# Altium PCB PCB1.pcbdoc (part 1 of 2)
Units mil, origin at the board's own origin, x right, y up, seen from the top; angles counter-clockwise.
Board outline 2760.2 x 1953.83 mil, 2 copper layers (Top Layer, Bottom Layer); 18 components, 51 nets, 238 pads, 251 vias.
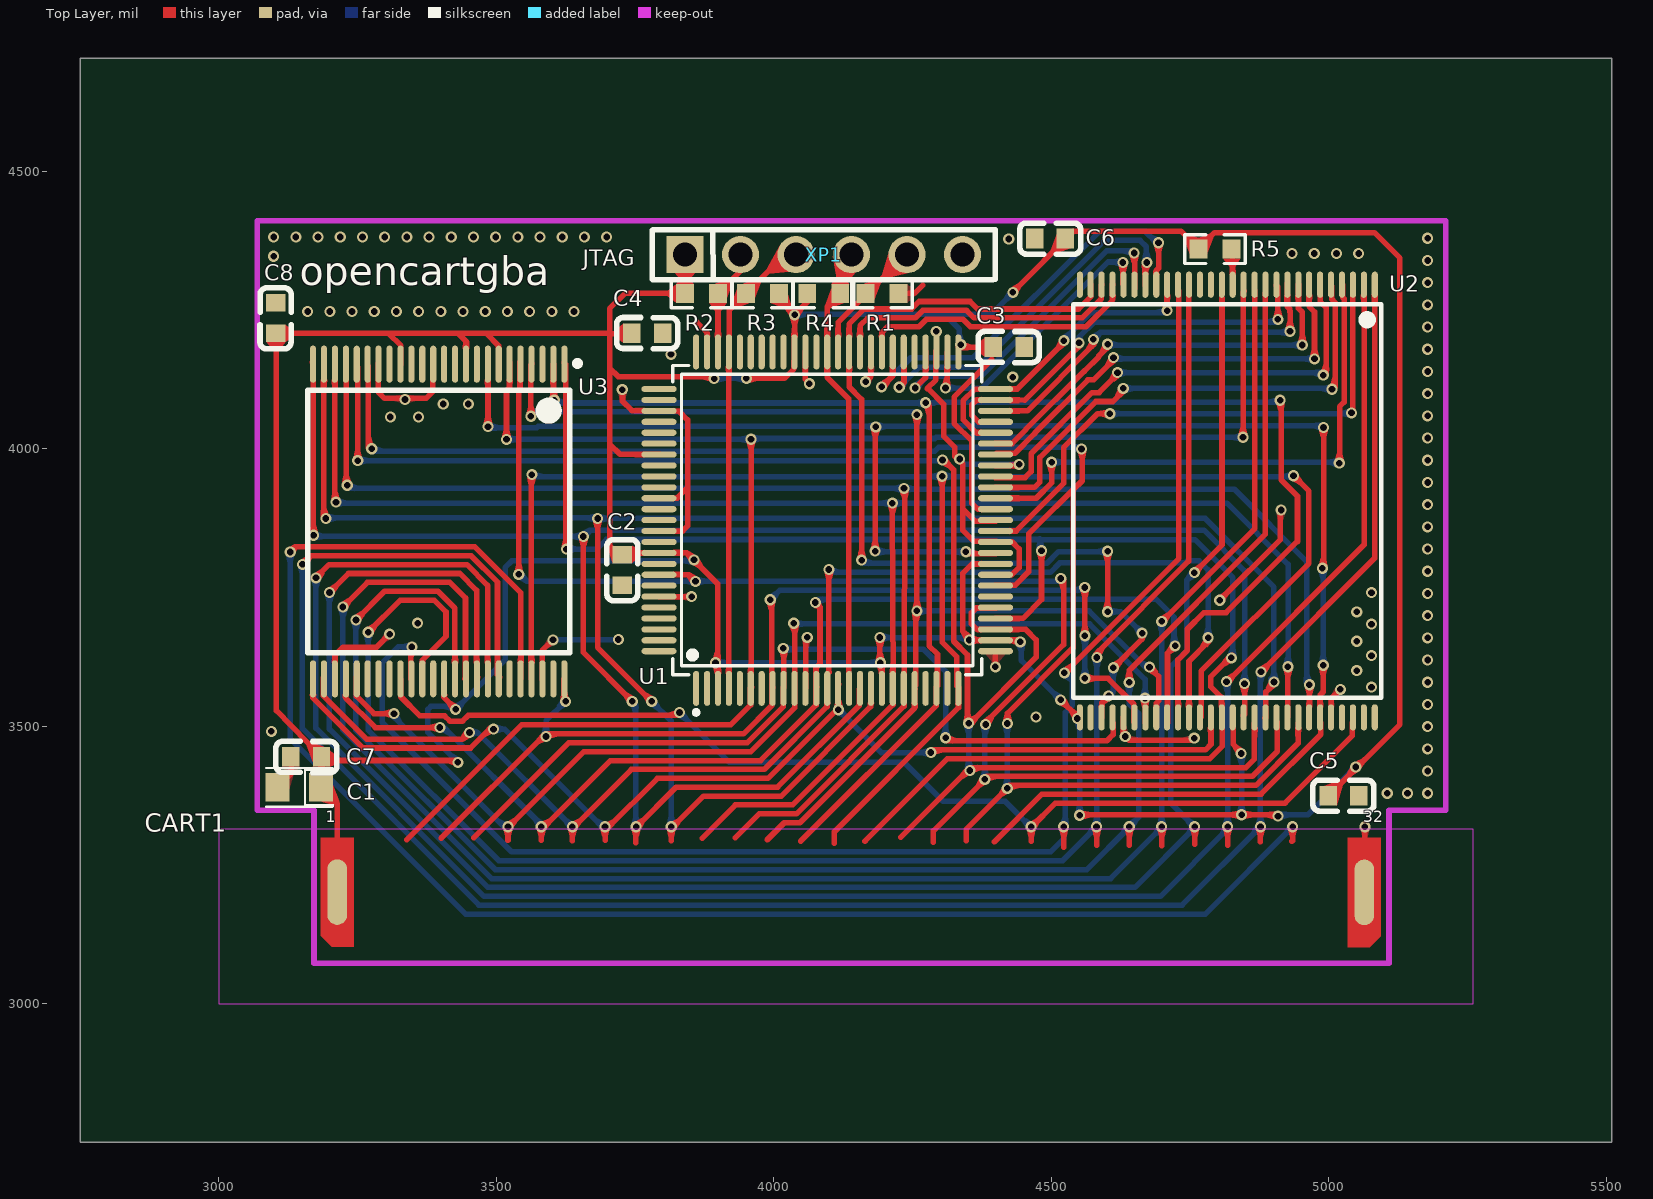
[diagram p0: Top Layer view]
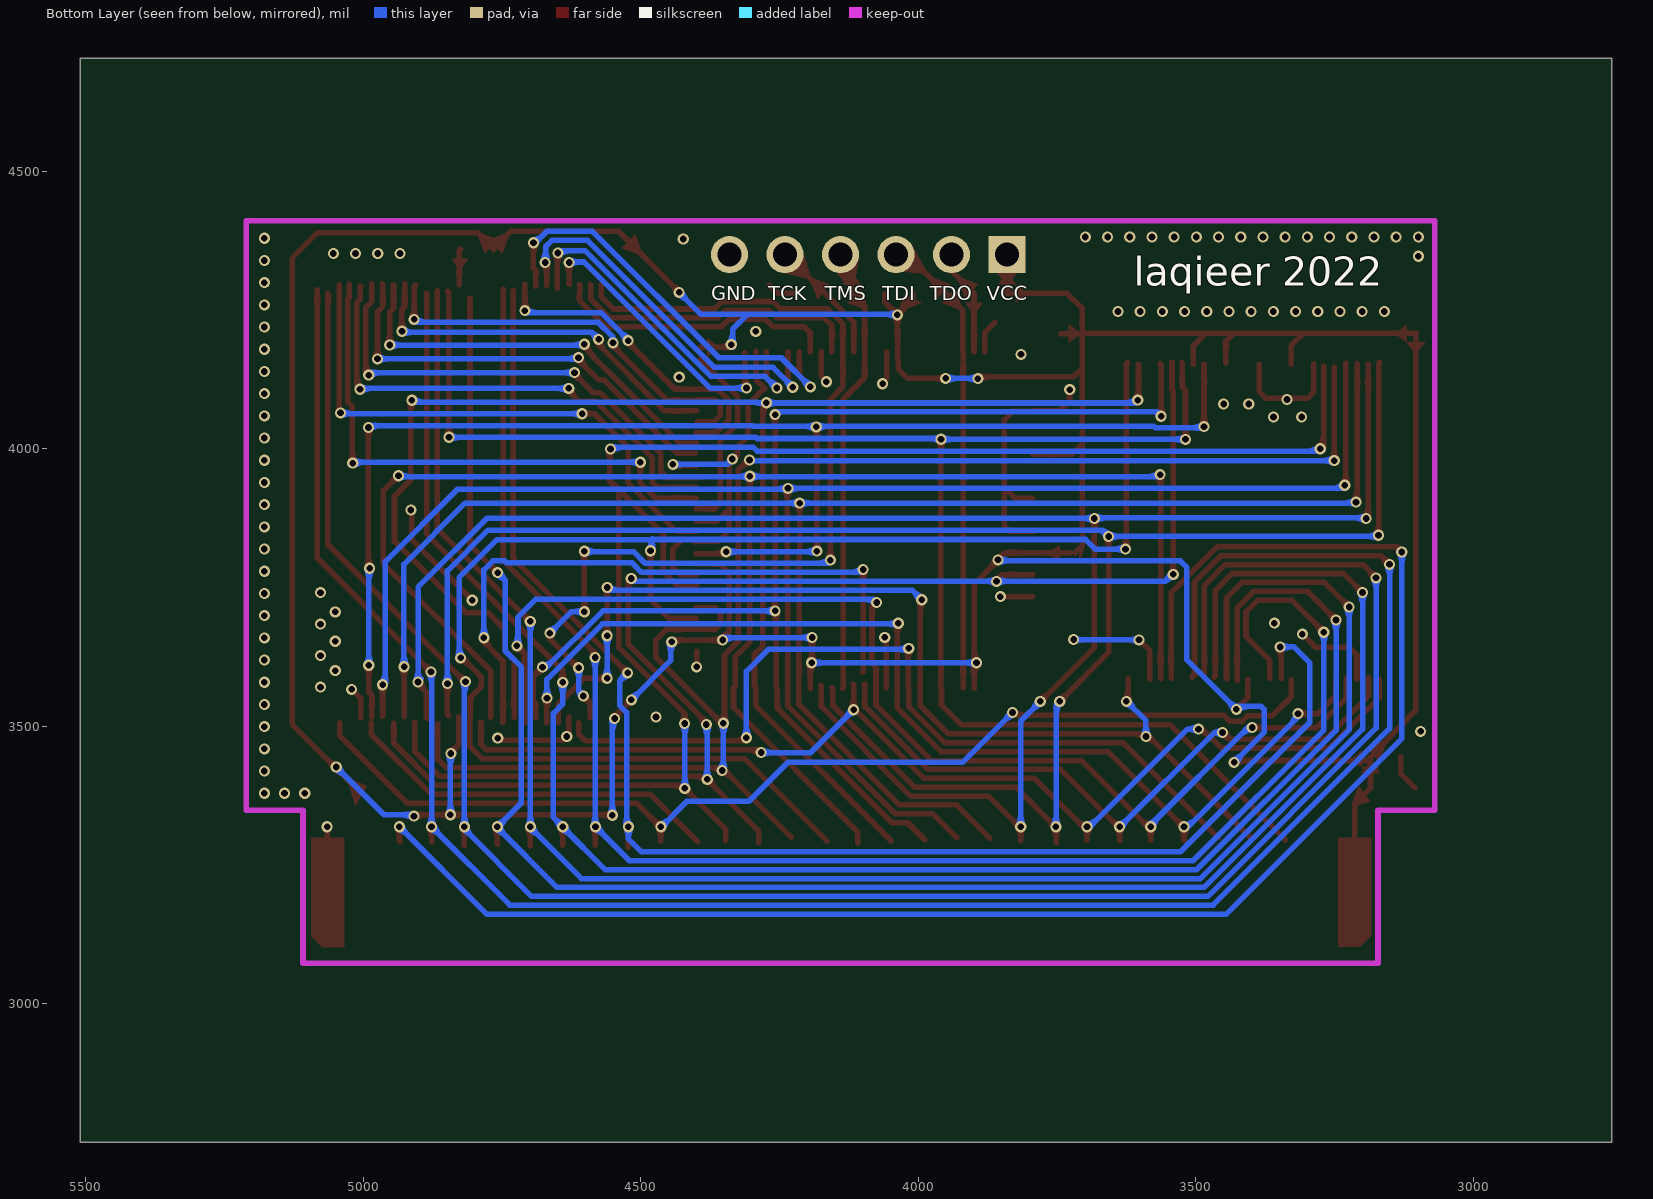
[diagram p1: Bottom Layer view, seen from below]

## Layer stack, top to bottom
Top Layer: signal copper (thickness not stored)
Dielectric: dielectric 12.6, FR-4, Dk 4.8
Bottom Layer: signal copper (thickness not stored)

## Board outline
5510.2,2750 2750,2750 2750,4703.83 5510.2,4703.83

## Design rules (kind name [scope] priority, off if disabled: settings)
Clearance safeClearance [All] p1: gap=7 ignorepadtopadclearanceinfootprint=FALSE except(0: Via-Fill Fill-Poly Region-Poly Poly-Poly; 6: Track-Track Track-SMDPad SMDPad-SMDPad Track-THPad SMDPad-THPad THPad-THPad Track-Via SMDPad-Via THPad-Via Via-Via Track-Fill SMDPad-Fill THPad-Fill Fill-Fill Track-Region SMDPad-Region THPad-Region Via-Region Fill-Region Region-Region Track-Text SMDPad-Text THPad-Text Via-Text Fill-Text Region-Text Poly-Text Text-Text Track-Hole SMDPad-Hole THPad-Hole Via-Hole Fill-Hole Region-Hole Text-Hole; 11.8: Track-Sheet SMDPad-Sheet THPad-Sheet Via-Sheet Fill-Sheet Region-Sheet Poly-Sheet Text-Sheet Sheet-Hole; 12: Track-Poly SMDPad-Poly THPad-Poly Via-Poly Poly-Hole)
DiffPairsRouting differentialPair [All] p1: maxuncoupledlength=10 minlimit=6 maxlimit=50 mostfreqgap=6 toplayer_minwidth=5 toplayer_prefwidth=10 toplayer_maxwidth=100 bottomlayer_minwidth=5 bottomlayer_prefwidth=10 bottomlayer_maxwidth=100
PasteMaskExpansion pasteMaskExpansion [All] p1: expansion=0
PlaneConnect innerPlane [All] p1: planeconnectstyle=Relief reliefexpansion=20 reliefentries=4 reliefconductorwidth=10 reliefairgap=10
PolygonConnect copperRegion [All] p1: connectstyle=Relief reliefentries=4 reliefconductorwidth=10 polygonreliefangle="90 Angle" airgapwidth=10
RoutingVias viaSize [All] p1: viastyle="Through Hole" holewidth=12.0078 minholewidth=11.811 maxholewidth=236.2204 width=24.0158 minwidth=19.685 maxwidth=393.7008
SolderMaskExpansion solderMaskExpansion [All] p1: useseparateexpansions=TRUE expansion=4 expansionbottom=4
Width trackWidth [All] p1: maxlimit=100 minlimit=5 preferedwidth=10

## Components (designator, comment, footprint, x,y, rotation, side; value= is the part's Value field where it differs from the comment)
C1 "10uf" CAP-SMD_L2.0-W1.3-FD 3145,3389.69 r180 top
C2 "100nF/0603/50V" C0603 3727.1,3781.53 r90 top
C3 "100nF/0603/50V" C0603 4423.4,4183.17 r0 top
C4 "100nF/0603/50V" C0603 3771.96,4208.22 r0 top
C5 "100nF/0603/50V" C0603 5026.47,3374.69 r0 top
C6 "100nF/0603/50V" C0603 4497.8,4378.59 r180 top
C7 "100nF/0603/50V" C0603 3157.44,3444.69 r180 top
C8 "100nF/0603/50V" C0603 3102.4,4235.19 r90 top
CART1 "GBACartridge" GBACartridge 4137.7,3789.84 r0 top
R1 "10kω" R0603 4195,4279.69 r180 top
R2 "10kω" R0603 3869.7,4279.69 r180 top
R3 "10kω" R0603 3979.7,4279.69 r0 top
R4 "10kω" R0603 4090,4279.69 r180 top
R5 "10kω" R0603 4795,4359.69 r180 top
U1 "EPM3064ATC100-10N" TQFP-100_L14.0-W14.0-P0.50-LS16.0-BL 4096.32,3871.29 r0 top
U2 "S29GL256S10TFI010" TSOP-56_L18.4-W14.0-P0.50-LS20.0-TL 4817.11,3905.68 r270 top
U3 "MB85R1001ANC-GE1" TSOP-48_L12.4-W12.2-P0.50-LS14.0-BL 3396.13,3868.71 r180 top
XP1 "JTAG" JTAG_5P-P2.54 4040,4349.69 r0 top

## Footprints (in the part's own frame and the unit in brackets; to place one, negate y for a bottom-side part, rotate by r counter-clockwise, add the part's x,y. Pads: shape width x height; smd on the part's side, far side on the other; paste and mask are expansions set on the pad)
C0603 [mm]
  rect 0.8x0.9 smd: 1(-0.7,0) 2(0.7,0)
  silkscreen extent -1.41,-0.71 1.39,0.72
CAP-SMD_L2.0-W1.3-FD [mm]
  rect 1.1x1.3 smd: 1(-1,0) 2(1,0)
  silkscreen extent -1.57,-0.89 1.52,0.89
GBACartridge [mil]
  oval 35.64x118.01 smd: 1(-924.37,-588.89)
  oval 35.59x118.41 smd: 32(926.33,-589.22)
  Top Layer region: 896.67,-687.9 896.94,-490.55 955.99,-490.55 955.72,-668.22 936.04,-687.9
  Top Layer region: -895.02,-490.55 -894.67,-687.23 -934.04,-687.23 -953.72,-667.55 -954.07,-490.55
JTAG_5P-P2.54 [mil]
  rect 66.9x66.9 hole 43.3: 1(-200,0)
  round 66.9 hole 43.3: 2(-100,0) 3(0,0) 4(100,0) 5(200,0) 6(300,0)
  silkscreen extent -259,-45 359,45
R0603 [mil]
  rect 31.8x34 smd: 1(-29.7,0) 2(29.7,0)
  silkscreen extent -54,-26 54,26
TQFP-100_L14.0-W14.0-P0.50-LS16.0-BL [mm]
  oval 0.28x1.6 smd: 1(-6,-7.7) 2(-5.5,-7.7) 3(-5,-7.7) 4(-4.5,-7.7) 5(-4,-7.7) 6(-3.5,-7.7) 7(-3,-7.7) 8(-2.5,-7.7) 9(-2,-7.7) 10(-1.5,-7.7) 11(-1,-7.7) 12(-0.5,-7.7) 13(0,-7.7) 14(0.5,-7.7) 15(1,-7.7) 16(1.5,-7.7) 17(2,-7.7) 18(2.5,-7.7) 19(3,-7.7) 20(3.5,-7.7) 21(4,-7.7) 22(4.5,-7.7) 23(5,-7.7) 24(5.5,-7.7) 25(6,-7.7) 51(6,7.7) 52(5.5,7.7) 53(5,7.7) 54(4.5,7.7) 55(4,7.7) 56(3.5,7.7) 57(3,7.7) 58(2.5,7.7) 59(2,7.7) 60(1.5,7.7) 61(1,7.7) 62(0.5,7.7) 63(0,7.7) 64(-0.5,7.7) 65(-1,7.7) 66(-1.5,7.7) 67(-2,7.7) 68(-2.5,7.7) 69(-3,7.7) 70(-3.5,7.7) 71(-4,7.7) 72(-4.5,7.7) 73(-5,7.7) 74(-5.5,7.7) 75(-6,7.7)
  oval 1.6x0.28 smd: 26(7.7,-6) 27(7.7,-5.5) 28(7.7,-5) 29(7.7,-4.5) 30(7.7,-4) 31(7.7,-3.5) 32(7.7,-3) 33(7.7,-2.5) 34(7.7,-2) 35(7.7,-1.5) 36(7.7,-1) 37(7.7,-0.5) 38(7.7,0) 39(7.7,0.5) 40(7.7,1) 41(7.7,1.5) 42(7.7,2) 43(7.7,2.5) 44(7.7,3) 45(7.7,3.5) 46(7.7,4) 47(7.7,4.5) 48(7.7,5) 49(7.7,5.5) 50(7.7,6) 76(-7.7,6) 77(-7.7,5.5) 78(-7.7,5) 79(-7.7,4.5) 80(-7.7,4) 81(-7.7,3.5) 82(-7.7,3) 83(-7.7,2.5) 84(-7.7,2) 85(-7.7,1.5) 86(-7.7,1) 87(-7.7,0.5) 88(-7.7,0) 89(-7.7,-0.5) 90(-7.7,-1) 91(-7.7,-1.5) 92(-7.7,-2) 93(-7.7,-2.5) 94(-7.7,-3) 95(-7.7,-3.5) 96(-7.7,-4) 97(-7.7,-4.5) 98(-7.7,-5) 99(-7.7,-5.5) 100(-7.7,-6)
  silkscreen extent -7.08,-8.9 7.08,7.08
TSOP-48_L12.4-W12.2-P0.50-LS14.0-BL [mil]
  oval 11x66.9 smd: 1(-226.4,-283.5) 2(-206.7,-283.5) 3(-187,-283.5) 4(-167.3,-283.5) 5(-147.6,-283.5) 6(-127.9,-283.5) 7(-108.3,-283.5) 8(-88.6,-283.5) 9(-68.9,-283.5) 10(-49.2,-283.5) 11(-29.5,-283.5) 12(-9.8,-283.5) 13(9.8,-283.5) 14(29.5,-283.5) 15(49.2,-283.5) 16(68.9,-283.5) 17(88.6,-283.5) 18(108.3,-283.5) 19(128,-283.5) 20(147.6,-283.5) 21(167.3,-283.5) 22(187,-283.5) 23(206.7,-283.5) 24(226.4,-283.5) 25(226.4,283.5) 26(206.7,283.5) 27(187,283.5) 28(167.3,283.5) 29(147.6,283.5) 30(128,283.5) 31(108.3,283.5) 32(88.6,283.5) 33(68.9,283.5) 34(49.2,283.5) 35(29.5,283.5) 36(9.8,283.5) 37(-9.8,283.5) 38(-29.5,283.5) 39(-49.2,283.5) 40(-68.9,283.5) 41(-88.6,283.5) 42(-108.3,283.5) 43(-127.9,283.5) 44(-147.6,283.5) 45(-167.3,283.5) 46(-187,283.5) 47(-206.7,283.5) 48(-226.4,283.5)
  silkscreen extent -255,-290 236,236
TSOP-56_L18.4-W14.0-P0.50-LS20.0-TL [mil]
  oval 47.2x11 smd: 1(-389.8,265.8) 2(-389.8,246.1) 3(-389.8,226.4) 4(-389.8,206.7) 5(-389.8,187) 6(-389.8,167.3) 7(-389.8,147.6) 8(-389.8,128) 9(-389.8,108.3) 10(-389.8,88.6) 11(-389.8,68.9) 12(-389.8,49.2) 13(-389.8,29.5) 14(-389.8,9.8) 15(-389.8,-9.8) 16(-389.8,-29.5) 17(-389.8,-49.2) 18(-389.8,-68.9) 19(-389.8,-88.6) 20(-389.8,-108.3) 21(-389.8,-127.9) 22(-389.8,-147.6) 23(-389.8,-167.3) 24(-389.8,-187) 25(-389.8,-206.7) 26(-389.8,-226.4) 27(-389.8,-246.1) 28(-389.8,-265.7) 29(389.8,-265.7) 30(389.8,-246.1) 31(389.8,-226.4) 32(389.8,-206.7) 33(389.8,-187) 34(389.8,-167.3) 35(389.8,-147.6) 36(389.8,-127.9) 37(389.8,-108.3) 38(389.8,-88.6) 39(389.8,-68.9) 40(389.8,-49.2) 41(389.8,-29.5) 42(389.8,-9.8) 43(389.8,9.8) 44(389.8,29.5) 45(389.8,49.2) 46(389.8,68.9) 47(389.8,88.6) 48(389.8,108.3) 49(389.8,128) 50(389.8,147.6) 51(389.8,167.3) 52(389.8,187) 53(389.8,206.7) 54(389.8,226.4) 55(389.8,246.1) 56(389.8,265.8)
  silkscreen extent -354,-278 354,278

## Via types
v1: diameter 20, hole 12.01, Top Layer to Bottom Layer, 251 vias

## Nets (pads, with @x,y where several pads share a name; then routed paths per layer and width w, separated by ;. In a path a pad name is that pad's centre, name@x,y a point inside that pad or via, vN(x,y) a via of type N, cw(c..) or ccw(c..) an arc to the next point about the centre after c; other vN are vias at no path point)
$1N60766: R5.1 U2.14 | length 65.1
  Top Layer w10: R5.1@4824.7,4359.69 4826.91,4357.48 U2.14@4826.91,4295.48
A16: U2.54 U3.33 | length 1973.6
  Top Layer w10: U3.33@3327.81,3583.75 3327.81,3553.05 3362.23,3518.63 3406.99,3518.63 3416.54,3509.08 3439.05,3509.08 3449.41,3519.44 3824.76,3519.44 v1(3830,3524.69) ; v1@4463.8,3317.75 v1@4463.92,3317.86 ; v1(4463.8,3318.74) 4463.92,3318.63 v1@4463.92,3317.86 ; 4463.92,3292.74 v1@4463.92,3317.86 ; U2.54@5042.1,3506.37 5042.1,3482.42 4921.08,3361.41 4507.46,3361.41 v1@4463.92,3317.86
  Bottom Layer w10: v1(3830,3524.69) 3920,3434.69 4235,3434.69 4305,3364.69 4416.87,3364.69 v1@4463.8,3317.75
A17: U2.19 U3.34 | length 2687.2
  Top Layer w10: U3.34@3345.79,3585.2 3346.23,3585.64 3346.23,3641.2 v1(3347.77,3642.73) ; v1(4522.27,3318.74) 4522.67,3318.35 4522.67,3281.88 ; v1(4523.63,3596.02) 4729.93,3802.32 U2.19@4729.93,4284.18
  Bottom Layer w10: v1(3347.77,3642.73) 3323.17,3642.73 3294.22,3613.78 3294.22,3507.1 3527.84,3273.48 4498.79,3273.48 4522.27,3296.96 v1(4522.27,3318.74) 4525.27,3321.74 4525.27,3524.83 4537.89,3537.46 4537.89,3581.76 v1(4523.63,3596.02)
A18: U2.18 U3.35 | length 2992.3
  Top Layer w10: v1(3269.16,3669.19) 3327.05,3727.08 3388.08,3727.08 3409.36,3705.8 3409.36,3661.78 3366.74,3619.16 U3.35@3366.74,3586.35 ; v1(4581.62,3318.74) 4581.91,3318.45 4581.91,3285.34 ; v1(4582.01,3623.86) 4582.01,3631.77 4747.62,3797.38 U2.18@4747.62,4287.13
  Bottom Layer w10: v1(3269.16,3669.19) 3269.16,3492.99 3504.68,3257.48 4520.35,3257.48 v1(4581.62,3318.74) 4582.06,3319.18 v1@4582.06,3623.82
A19: U2.11 U3.38 | length 3182
  Top Layer w10: v1(3247.06,3691.3) 3298.84,3743.08 3394.71,3743.08 3425.36,3712.42 U3.38@3425.36,3582.25 ; v1(4640.42,3318.74) 4640.66,3318.5 4640.66,3285.34 ; v1(4640.44,3578.92) 4640.44,3600.61 4885.35,3845.52 U2.11@4885.35,4280.45
  Bottom Layer w10: v1(3247.06,3691.3) 3247.06,3492.47 3498.06,3241.48 4564.05,3241.48 4640.42,3317.84 v1(4640.42,3318.74) 4657.42,3335.74 4657.42,3522.84 4640.44,3539.82 v1(4640.44,3578.92)
A20: U2.12 U3.39 | length 3315.8
  Top Layer w10: v1(3223.48,3714.87) 3267.69,3759.08 3416.38,3759.08 3444.52,3730.94 3444.52,3586.67 U3.39@3443.05,3585.2 ; v1(4698.83,3318.74) 4699.42,3318.15 4699.42,3284.84 ; v1(4698.99,3688.86) 4699.68,3688.86 4866.98,3856.16 U2.12@4866.98,4284.18
  Bottom Layer w10: v1(3223.48,3714.87) 3223.48,3493.42 3491.43,3225.48 4607.07,3225.48 4698.83,3317.23 v1(4698.83,3318.74) 4698.99,3318.9 v1@4698.99,3690.33
A21: U2.15 U3.40 | length 3458.6
  Top Layer w10: v1(3199.36,3740.77) 3233.66,3775.08 3434.21,3775.08 3464.6,3744.69 3464.6,3590.47 U3.40@3466.81,3588.26 ; v1(4757.79,3776.67) 4807.64,3826.52 4807.64,4270.81 ; v1(4758.21,3318.74) 4758.66,3318.29 4758.66,3287.31
  Bottom Layer w10: v1(3199.36,3740.77) 3199.36,3494.92 3484.8,3209.48 4650.75,3209.48 4758.21,3316.93 v1(4758.21,3318.74) 4714.99,3361.96 4714.99,3606.44 4744.11,3635.57 4744.11,3762.99 v1(4757.79,3776.67)
A22: U2.2 U3.41 | length 3688.4
  Top Layer w10: v1(3175.05,3767.3) 3198.83,3791.08 3446.93,3791.08 3484.49,3753.51 U3.41@3484.49,3592.68 ; v1(4815.66,3580.34) 4817.13,3580.34 5063.66,3826.87 U2.2@5063.66,4280.19 ; v1(4817.76,3318.74) 4817.91,3318.59 4817.91,3285.34
  Bottom Layer w10: v1(3175.05,3767.3) 3175.05,3496.6 3478.17,3193.48 4696.64,3193.48 4817.76,3314.59 v1(4817.76,3318.74) 4817.76,3578.24 v1(4815.66,3580.34)
A23: U2.1 U3.42 | length 3842.9
  Top Layer w10: v1(3150.73,3791.61) 3166.2,3807.08 3454.7,3807.08 3502.18,3759.6 3502.18,3592.68 U3.42@3506.6,3588.26 ; 4876.66,3291.75 4876.85,3291.94 v1(4876.85,3318.74) ; v1(4877.99,3597.93) 5082.81,3802.76 U2.1@5082.81,4286.09
  Bottom Layer w10: v1(3150.73,3791.61) 3150.73,3495.42 3468.68,3177.48 4735.58,3177.48 v1(4876.85,3318.74) 4876.85,3596.79 v1(4877.99,3597.93)
AD0: U1.10 U2.35 U3.29 | length 1935
  Top Layer w10: U3.29@3247.99,3587.03 3247.99,3554.07 3279.38,3522.68 v1(3315.77,3522.68) ; 3521.01,3294.55 3521.09,3294.63 v1(3521.09,3318.74) ; v1@3522.13,3318.52 3657.64,3454.03 3958.69,3454.03 4038.07,3533.41 4038.07,3683.38 v1(4035.94,3685.51) ; U2.35@4669.08,3506.23 v1@4669.08,3542.58
  Bottom Layer w10: v1(3315.77,3522.68) 3315.77,3516.86 3515.76,3316.87 v1@3521.09,3316.87 ; v1(4035.94,3685.51) 4037.23,3684.22 4568.92,3684.22 4668.97,3584.17 v1(4668.97,3550.45)
AD1: U1.12 U2.37 U3.28 | length 2148.6
  Top Layer w10: U3.28@3228.34,3586.05 3228.34,3551.09 3282.17,3497.26 3397.92,3497.26 v1(3398.29,3497.63) ; v1(3581.01,3318.74) 3581.24,3318.52 3581.24,3294.55 ; v1@3583.89,3316.43 3705.49,3438.03 3976.17,3438.03 4076.05,3537.91 U1.12@4076.05,3569.65 ; v1(4074.81,3722.73) 4083.23,3714.31 4083.23,3612.59 4075.95,3605.31 ; 4076.05,3605.31 U1.12@4076.05,3570.08 ; U1.12@4076.98,3570.58 U1.12@4076.71,3570.31 ; U2.37@4709.36,3506.23 4709.36,3630.99 v1(4723.11,3644.74) ; U1.12@4076.05,3569.65 U1.12@4076.71,3570.31 ; U1.12@4076.05,3569.65 U1.12@4076.05,3570.08 ; U1.12@4076.05,3570.08 U1.12@4076.71,3570.31
  Bottom Layer w10: v1(3398.29,3497.63) 3405.73,3497.63 3581.01,3322.35 v1@3581.01,3316.87 ; v1@4074.87,3722.67 4081,3728.8 4688.74,3728.8 4721.15,3696.39 4721.15,3646.71 v1(4723.11,3644.74)
AD2: U1.13 U2.39 U3.26 | length 2368.1
  Top Layer w10: U3.26@3188.06,3587.03 3188.06,3555 3266.43,3476.63 3438.6,3476.63 3449.46,3487.5 v1@3452.08,3487.5 ; 3636.87,3293.56 3637.01,3293.71 v1(3637.01,3318.74) ; v1@3639.75,3318.26 3743.52,3422.03 3982.8,3422.03 4095.98,3535.21 4095.98,3575.6 U1.13@4095.76,3575.82 ; v1(4099.23,3782.24) 4099.23,3597.81 U1.13@4099.79,3597.25 ; U2.39@4748.16,3506.72 4748.16,3616.94 v1@4782.55,3651.32
  Bottom Layer w10: v1(3451.57,3488.52) 3466.35,3488.52 v1@3637.01,3317.86 ; v1(4099.23,3782.24) 4104.23,3777.24 4498.41,3777.24 4515.3,3794.14 4741.54,3794.14 4745.07,3797.67 4766.49,3797.67 4782.55,3781.61 v1(4782.55,3659.29)
AD3: U1.14 U2.41 U3.25 | length 1997.6
  Top Layer w10: U3.25@3169.4,3584.08 3169.4,3551.04 3259.8,3460.63 3453.63,3460.63 3487.69,3494.69 v1(3495,3494.69) ; v1(3695.95,3318.74) 3696.11,3318.58 3696.11,3294.22 ; v1@3699.68,3315.31 3790.4,3406.03 3989.43,3406.03 4116.27,3532.87 4116.27,3574.94 U1.14@4116.71,3575.39 ; v1@4291.4,3457.41 4777.77,3457.41 4787.79,3467.42 U2.41@4787.79,3506.72
  Bottom Layer w10: v1(3495,3494.69) 3515,3494.69 3693.79,3315.89 v1@3695.95,3315.89 ; v1(4116.38,3529.64) 4193.59,3452.43 v1(4282.93,3452.43)
AD4: U1.16 U2.44 U3.24 | length 3405.3
  Top Layer w10: U3.24@3168.33,4155.74 3170.54,4153.53 v1(3170.54,3844.08) ; v1(3656.82,3841.87) 3656.82,3632.87 v1(3745,3544.69) ; v1@3750.84,3316.7 v1@3751.41,3317.26 ; 3751.41,3289.61 v1@3751.41,3317.26 ; v1(3751.86,3318.74) 3751.41,3318.29 v1@3751.41,3317.26 ; U1.16@4156.01,3568.84 4153.94,3566.77 4153.94,3537.06 4006.91,3390.03 3824.18,3390.03 v1@3751.41,3317.26 ; U2.44@4845.99,3519.15 4848.2,3521.36 v1(4848.2,3576.62)
  Bottom Layer w10: v1(3170.54,3844.08) 3172.75,3841.87 v1(3656.82,3841.87) 3668.23,3853.28 4774.89,3853.28 4848.2,3779.98 v1(4848.2,3576.62) ; v1(3745,3544.69) 3751.41,3538.28 3751.41,3320.68 v1@3751.86,3320.22
AD5: U1.17 U2.46 U3.23 | length 3418.5
  Top Layer w10: U3.23@3188.96,4152.3 3188.96,3878.21 v1(3192.89,3874.28) ; v1(3682.6,3874.28) 3682.6,3642.08 v1(3780,3544.69) ; 3815.26,3293.56 v1@3815.26,3318.71 ; v1@3815.6,3316.3 3873.34,3374.03 4013.54,3374.03 4174.57,3535.06 4174.57,3572.55 U1.17@4175.66,3573.64 ; U2.46@4885.04,3514.73 4886.51,3516.21 4886.51,3561.89 4901.25,3576.62 v1(4901.25,3579.57)
  Bottom Layer w10: v1@3190.92,3875.27 3681.62,3875.27 v1(3682.6,3874.28) 4777.47,3874.28 4901.25,3750.5 v1(4901.25,3579.57) v1@4895.08,3585.73 ; v1(3780,3544.69) 3815.23,3509.46 v1@3815.23,3317.28
  other v1: 3815.23,3318.74
AD6: U1.19 U2.48 U3.22 | length 3102.1
  Top Layer w10: U3.22@3209.1,4152.63 3209.1,3905.72 v1(3211.06,3903.76) ; 3871.16,3298.28 3930.9,3358.03 4033.97,3358.03 4214.85,3538.91 U1.19@4214.85,3568.76 ; v1(4213.58,3901.79) U1.19@4214.85,3568.76 ; U1.19@4214.95,3576.26 4214.85,3576.15 U1.19@4214.85,3568.76 ; U2.48@4926.3,3516.7 v1(4926.3,3607.08)
  Bottom Layer w10: v1@3209.91,3904.9 3213.03,3901.79 v1(4213.58,3901.79) 4816.27,3901.79 4926.62,3791.44 4926.62,3607.4 v1(4926.3,3607.08)
AD7: U1.20 U2.50 U3.21 | length 3085
  Top Layer w10: U3.21@3229.37,4154.24 3229.37,3942.04 3231.34,3940.08 v1(3231.34,3934.18) ; 3930.73,3299.35 3973.41,3342.03 4040.6,3342.03 4234.74,3536.17 U1.20@4234.74,3567.51 ; U1.20@4234.16,3569.27 4234.74,3568.7 U1.20@4234.74,3567.51 ; v1(4234.59,3928.53) 4236.07,3927.06 U1.20@4234.74,3567.51 ; U2.50@4964.5,3517.65 4965,3518.15 v1(4965,3574.69)
  Bottom Layer w10: v1(3231.34,3934.18) 3236.99,3928.53 v1(4234.59,3928.53) 4235.82,3927.31 4829.67,3927.31 4960,3796.98 4960,3579.69 v1(4965,3574.69)
AD8: U1.21 U2.36 U3.4 | length 2236.5
  Top Layer w10: v1(3562.35,4058.4) 3562.35,4151.24 U3.4@3563.82,4152.71 ; 3988.24,3295.4 4018.87,3326.03 4047.23,3326.03 4254.02,3532.82 4254.02,3566.43 U1.21@4254.68,3567.09 ; U1.21@4255.8,3573.54 v1@4255.8,3701.9 ; v1(4257.77,3707.8) 4257.77,4061.25 v1(4257.87,4061.35) ; v1(4676.83,3606.29) 4693.36,3589.75 4693.36,3545.74 ; U2.36@4689.34,3515.76 4689.34,3541.67 4693.36,3545.68
  Bottom Layer w10: v1(3562.35,4058.4) 3570.29,4066.35 4252.87,4066.35 v1(4257.87,4061.35) ; v1(4257.77,3707.8) 4567.97,3707.8 4669.49,3606.29 v1(4676.83,3606.29)
AD9: U1.23 U2.38 U3.2 | length 2975.7
  Top Layer w10: U3.2@3603.03,4152.25 3603.03,4088.8 v1(3604.34,4087.49) ; 4048.47,3292.68 4292.33,3536.54 U1.23@4292.33,3570.02 ; v1(4273.66,4082.68) 4280,4076.34 4280,3644.69 4295,3629.69 4295,3572.69 U1.23@4292.33,3570.02 ; U1.23@4292.33,3570.25 U1.23@4292.33,3570.02 ; U2.38@4728.19,3516.32 4728.19,3619.59 4745,3636.4 4745,3674.69 4775,3704.69 4815,3704.69 4943.08,3832.76 4943.69,3832.76 4943.69,3914.25 4914.31,3943.63 4914.31,4085.4 v1(4912.46,4087.25)
  Bottom Layer w10: v1(3604.34,4087.49) 3609.48,4082.35 4288.67,4082.35 4290.31,4083.99 4909.21,4083.99 v1(4912.46,4087.25)
AD10: U1.25 U2.40 U3.45 | length 3035.1
  Top Layer w10: U3.45@3563,3585.82 3563,3952.09 v1(3564.06,3953.15) ; 4109.23,3289.01 4109.23,3309.75 4332.85,3533.37 4332.85,3569.26 4329.37,3572.74 4329.37,3625.32 4303.26,3651.42 v1(4303.26,3950.32) ; U2.40@4769.85,3516.57 4769.85,3599.09 4964,3793.23 4964,3923.64 v1(4936.37,3951.27)
  Bottom Layer w10: v1(3564.06,3953.15) 3567.68,3949.53 4934.63,3949.53 v1(4936.37,3951.27)
AD11: U1.29 U2.42 U3.1 | length 2823.6
  Top Layer w10: U3.1@3622.07,4155.03 3625.34,4151.76 3625.34,3820.2 v1(3626.49,3819.06) ; 4164.31,3292.99 4312.73,3441.41 4785.61,3441.41 4807.9,3463.69 U2.42@4807.9,3507.9 ; U1.29@4400.21,3694.28 4448.71,3694.28 4482.4,3727.97 4482.4,3816.87 v1@4483.1,3817.57 ; U2.42@4806.82,3511.08 4806.82,3551.68 4787.66,3570.84 4787.66,3589.18 v1@4825.97,3627.49
  Bottom Layer w10: v1(3626.49,3819.06) 3681.13,3819.06 3698.43,3836.35 4478.52,3836.35 4479.46,3837.28 ; v1@4479.46,3819.06 4479.46,3837.28 ; v1(4824.5,3623.07) 4827.17,3625.75 4827.17,3767.76 4758.79,3836.14 4480.6,3836.14 4479.46,3837.28
  other v1: 4482.5,3816.09
AD12: U1.28 U1.30 U2.45 U3.20 | length 2962.7
  Top Layer w10: v1@3250.19,3978.48 U3.20@3250.19,4146.46 ; 4228.5,3299.58 4354.33,3425.41 4850.63,3425.41 4865.86,3440.64 U2.45@4865.86,3503.97 ; v1(4303.84,3979.58) 4306.46,3979.58 4324.26,3961.78 4324.26,3653.05 4349.05,3628.26 4349.05,3507.25 v1(4351.11,3505.19) 4353.6,3505.19 4472.64,3624.23 4472.64,3655.56 4453.94,3674.26 U1.28@4398.3,3674.47 ; v1@4351.81,3500.14 v1@4351.81,3502.72 ; U1.28@4399.47,3674.47 U1.28@4398.3,3674.47 ; U1.30@4400.03,3712.89 4365.1,3712.89 4356.26,3704.05 4356.26,3684.18 4365.98,3674.47 U1.28@4398.3,3674.47
  Bottom Layer w10: v1@3251.67,3978.48 4302.74,3978.48 v1(4303.84,3979.58) ; v1(4351.11,3505.19) 4351.11,3422.1 v1(4353.21,3420.01)
  other v1: 3250.4,3978.48
AD13: U1.93 U2.47 U3.5 | length 2607.9
  Top Layer w10: v1(3540.49,3773.61) 3540.49,4103.34 3542.7,4105.55 U3.5@3542.7,4156 ; U1.93@3793.5,3773.03 3846.8,3773.03 v1(3858.96,3760.87) ; 4287.38,3290.99 4287.38,3311.43 v1(4380.18,3404.23) ; v1(4381.74,3502.95) 4381.74,3506.45 4522.36,3647.07 4522.36,3760.9 v1(4517.06,3766.2) ; v1@4383.42,3409.41 4862.17,3409.41 4907.12,3454.35 U2.47@4907.12,3506.92
  Bottom Layer w10: v1(3540.49,3773.61) 3541.33,3774.45 3554.54,3761.24 4512.11,3761.24 v1(4517.06,3766.2) ; v1(4380.18,3404.23) 4380.18,3501.39 v1(4381.74,3502.95)
AD14: U1.32 U2.49 U3.19 | length 3104.8
  Top Layer w10: U3.19@3269.6,4148.63 3269.6,4001.28 3271.08,3999.8 v1(3275.5,3999.8) ; 4346.62,3293.29 4346.62,3314 v1(4420.57,3387.94) ; U1.32@4398.94,3753.75 4434.71,3753.75 4459.26,3778.3 4459.26,3846.33 4554.9,3941.97 4556.19,3941.97 ; v1@4420.57,3387.99 4425.98,3393.41 4868.8,3393.41 4944.68,3469.28 U2.49@4944.68,3505.63 ; v1(4420.95,3504.68) 4420.95,3523.04 4539.39,3641.47 4539.39,3925.17 4556.19,3941.97 ; v1@4556.19,4003.66 4556.19,3941.97
  Bottom Layer w10: v1(3275.5,3999.8) 3279.55,3995.75 4290.32,3995.75 4297.05,4002.48 4551.3,4002.48 v1(4554.32,3999.45) ; v1(4420.57,3387.94) 4420.57,3504.3 v1(4420.95,3504.68)
AD15: U1.35 U2.51 U3.8 | length 3282.6
  Top Layer w10: U3.8@3484.73,4152.21 3485,4151.95 v1(3485,4039.69) ; v1(4182.69,3815.35) v1@4182.69,4039.79 ; v1@4345.81,3816.96 4351.89,3810.88 U1.35@4400.05,3810.88 ; 4397.36,3291.72 4483.05,3377.41 4877.98,3377.41 4985.58,3485 U2.51@4985.58,3505.86 ; U2.51@4984.41,3515.88 4984.41,3556.48 4990,3562.08 v1(4990,3609.69) ; v1(4988.54,3784.61) 4990.64,3786.72 v1(4990.64,4038.16)
  Bottom Layer w10: v1(3485,4039.69) 3486.94,4037.75 3549.1,4037.75 3549.44,4037.4 3572.72,4037.4 3575.66,4040.35 4297.96,4040.35 4299.15,4041.54 4987.26,4041.54 v1(4990.64,4038.16) ; v1(4182.69,3815.35) 4183.75,3814.29 v1(4346.13,3814.29) ; v1(4988.54,3784.61) 4990,3783.15 v1(4990,3609.69)
  other v1: 4183.78,4039.36
FA0: U1.61 U2.27 U2.31 | length 1745.5
  Top Layer w10: v1(4158.37,3799.14) 4158.37,4088.95 4135.69,4111.63 U1.61@4135.69,4174.44 4135.69,4224.59 4162.78,4251.69 4248.19,4251.69 4261.72,4265.21 4353.84,4265.21 4367.37,4251.69 4549.05,4251.69 4571.01,4273.65 U2.27@4571.01,4295.48 ; U2.31@4591.09,3516.07 4591.09,3542.16 v1(4603.38,3554.45) ; v1(4601.47,3706.26) 4601.47,3815.04 v1(4601.57,3815.14) ; v1(4611.94,3605.27) 4663.78,3657.11 v1(4663.78,3667.57)
  Bottom Layer w10: v1(4158.37,3799.14) 4164.27,3793.24 4491.78,3793.24 4512.98,3814.44 4600.87,3814.44 v1(4601.57,3815.14) ; v1(4601.47,3706.26) 4625.09,3706.26 v1(4663.78,3667.57) ; v1(4603.38,3554.45) 4611.56,3562.63 v1@4611.56,3603.77
FA1: U1.60 U2.26 | length 538.8
  Top Layer w10: U1.60@4155.38,4174.44 4155.38,4221.65 4169.41,4235.69 4254.82,4235.69 4268.35,4249.21 4347.21,4249.21 4360.74,4235.69 4555.67,4235.69 4590,4270.01 4590,4294.78 U2.26@4590.71,4295.48
FA2: U1.58 U2.25 | length 513.7
  Top Layer w10: U1.58@4194.75,4174.44 4194.75,4209.43 4205,4219.69 4261.45,4219.69 4274.98,4233.21 4340.59,4233.21 4354.11,4219.69 4562.3,4219.69 4610,4267.39 4610,4295.08 U2.25@4610.41,4295.48
FA3: U1.52 U2.24 | length 522
  Top Layer w10: U1.52@4312.45,4172.67 v1@4312.45,4112.35 ; v1(4629.04,4335.59) 4629.04,4296.46 U2.24@4629.2,4296.29 ; v1@4309.61,4109.52 v1@4310.4,4109.33 ; v1@4309.61,4109.52 v1(4309.43,4109.33) v1@4310.4,4109.33 ; v1@4309.61,4109.52 v1@4312.45,4112.35 ; v1@4310.4,4109.33 v1@4312.45,4112.35
  Bottom Layer w10: v1@4310.1,4109.03 4374.94,4109.03 4602.27,4336.37 v1@4628.51,4336.37
FA4: U1.54 U2.23 | length 635.5
  Top Layer w10: v1(4254.72,4109.33) 4273.69,4128.3 U1.54@4273.69,4174.49 ; v1(4649.31,4352.64) 4650.32,4351.64 U2.23@4650.32,4289.24
  Bottom Layer w10: v1(4254.72,4109.33) 4275.83,4130.44 4373.72,4130.44 4599.86,4356.59 4645.37,4356.59 v1(4649.31,4352.64)
FA5: U1.56 U2.22 | length 698.8
  Top Layer w10: v1(4225.97,4110.74) 4234.63,4119.4 U1.56@4234.63,4174.65 ; U2.22@4669.16,4294.04 4669.25,4294.14 4669.25,4332.32 v1(4672.26,4335.34)
  Bottom Layer w10: v1(4225.97,4110.74) 4261.67,4146.44 4367.09,4146.44 4595.87,4375.22 4660.22,4375.22 4671.13,4364.31 4671.13,4336.46 v1(4672.26,4335.34)
FA6: U1.57 U2.21 | length 770
  Top Layer w10: v1(4194.4,4111.44) 4214.37,4131.4 U1.57@4214.37,4174.68 ; U2.21@4688.82,4292.44 4688.82,4320.66 4693.26,4325.11 v1@4693.26,4371.01
  Bottom Layer w10: v1(4194.4,4111.44) 4246.83,4163.86 4359.13,4163.86 4586.98,4391.71 4669.31,4391.71 v1@4688.44,4372.58
  other v1: 4693.33,4371.08
FA7: U1.46 U1.50 U2.20 | length 584.1
  Top Layer w10: U1.50@4399.51,4106.93 4361.39,4106.93 4340.97,4086.51 4340.97,4052.35 4364.65,4028.67 U1.46@4399.76,4028.67 ; U1.50@4400.02,4107.18 4438.62,4107.18 v1@4520.61,4189.17 ; v1(4708.73,4248.84) U2.20@4708.73,4296.25
  Bottom Layer w10: v1@4520.98,4194.66 4571.4,4245.08 4708.73,4245.08 v1(4708.73,4248.84)
  other v1: 4522.7,4194.66
FA8: U1.47 U1.49 U2.10 | length 746.6
  Top Layer w10: U1.47@4368.91,4047.99 4356.97,4059.93 4356.97,4079.44 4365.65,4088.12 U1.49@4399.55,4088.12 ; U1.47@4369.92,4048.49 U1.47@4398.51,4048.49 ; U1.49@4399.76,4088.12 U1.49@4399.55,4088.12 ; v1@4552.51,4187.47 4552.36,4187.47 4451.95,4087.06 U1.49@4399.55,4088.12 ; U2.10@4905.41,4294.55 4908.23,4291.73 v1(4908.23,4233.04)
  Bottom Layer w10: v1@4550.81,4194.25 4550.81,4201.87 4576.53,4227.58 4902.78,4227.58 v1(4908.23,4233.04)
  other v1: 4549.8,4190.79
FA9: U1.48 U2.9 | length 680.7
  Top Layer w10: U1.48@4399.47,4068.14 4456.88,4068.14 4576.21,4187.47 v1@4576.21,4190.86 ; U2.9@4925.17,4296.81 4925.17,4256.21 4929.48,4251.89 4929.48,4246.26 4930.24,4248.01 v1(4930.24,4211.59)
  Bottom Layer w10: v1(4575.8,4197) 4588.29,4209.49 4928.14,4209.49 v1(4930.24,4211.59)
FA10: U1.45 U2.8 | length 743.4
  Top Layer w10: U1.45@4399.21,4009.32 4429.35,4009.32 4453.88,4033.85 4453.88,4034.44 4559.43,4139.98 4560.04,4139.98 4585.52,4165.46 4585.52,4167.26 4601.5,4183.23 v1(4601.5,4188.22) ; U2.8@4945.48,4295.68 4945.48,4252.89 4952.26,4246.12 v1(4952.26,4186.76)
  Bottom Layer w10: v1@4601.61,4187.47 4602.41,4186.68 4952.17,4186.68 v1(4952.26,4186.76)
FA11: U1.44 U2.7 | length 788
  Top Layer w10: U1.44@4401.85,3991.51 4434.16,3991.51 4469.88,4027.22 4469.88,4027.81 4566.05,4123.98 4576.21,4123.98 v1@4616,4163.77 ; U2.7@4964.67,4296.81 4964.67,4256.21 4974.27,4246.62 v1(4974.27,4161.93)
  Bottom Layer w10: v1@4611.77,4163.77 4613.61,4161.93 v1(4974.27,4161.93)
  other v1: 4612.1,4164.14
FA12: U1.42 U2.6 | length 858.4
  Top Layer w10: U1.42@4399.33,3948.02 4452.86,3948.02 4463.55,3958.71 4463.55,3990.93 4573.66,4101.04 4586.29,4101.04 v1@4618.54,4133.3 ; U2.6@4984.42,4296.81 4984.99,4296.25 4984.99,4264.5 4995.57,4253.92 4995.57,4138.08 v1(4990.07,4132.58)
  Bottom Layer w10: v1(4619.4,4136.92) 4985.72,4136.92 v1(4990.07,4132.58)
FA13: U1.41 U2.5 | length 900.2
  Top Layer w10: U1.41@4400.05,3930.11 4469.75,3930.11 4479.55,3939.91 4479.55,3984.31 4580.28,4085.04 4610.92,4085.04 4629.6,4103.72 v1(4629.6,4108.71) ; U2.5@5004.74,4292.86 5005.31,4292.3 5005.31,4269.62 5011.57,4263.36 5011.57,4112.89 v1(5005.87,4107.18)
  Bottom Layer w10: v1(4629.6,4108.71) 5004.35,4108.71 v1(5005.87,4107.18)
FA14: U1.40 U2.4 | length 1003.6
  Top Layer w10: U1.40@4400.19,3910.69 4472.96,3910.69 4500.55,3938.28 v1@4500.55,3977.28 ; v1@5019.42,3972.3 5019.42,4075.67 5027.57,4083.83 5027.57,4269.98 5025.15,4272.41 U2.4@5025.15,4295.87
  Bottom Layer w10: v1(4500.55,3975.61) 5020.7,3975.61 v1@5024.06,3972.25
  other v1: 5018.85,3973.99
FA15: U1.37 U2.3 | length 999
  Top Layer w10: U1.37@4399.47,3851.6 4436.5,3851.6 4522.36,3937.46 4522.36,4001.87 4583.48,4062.99 v1(4605.6,4062.99) ; v1(5040.99,4064.52) 5043.57,4067.11 U2.3@5043.57,4295.02
  Bottom Layer w10: v1(4605.6,4062.99) 5039.46,4062.99 v1(5040.99,4064.52)
GND: C1.2 C2.1 C3.2 C4.2 C5.2 C6.2 C7.2 C8.2 CART1.32 R1.1 U1.11 U1.26 U1.33 U1.36 U1.38 U1.43 U1.53 U1.59 U1.65 U1.74 U1.78 U1.86 U1.89 U1.95 U2.33 U2.52 U3.13 U3.18 U3.27 U3.46 XP1.6 | length 2678.4
  Top Layer w10: C1.2@3105.64,3389.49 3130.17,3414.01 C7.2@3130.17,3444.97 ; U3.27@3209.38,3585.84 3209.38,3627.87 3223.73,3642.22 3284.21,3642.22 v1(3307.79,3665.8) ; U3.18@3287.25,4152.81 3287.25,4102.36 3298.82,4090.79 3373.36,4090.79 3385.67,4103.09 U3.13@3385.67,4152.3 ; U3.46@3582.53,3584.78 3582.53,3636.04 v1(3602.01,3655.52) ; v1@3727.35,4106.01 3727.35,4085.53 3744.46,4068.42 U1.78@3792.45,4068.42 ; U1.89@3792.45,3851.6 3835.5,3851.6 3844.73,3860.82 3844.73,3930.02 ; U1.78@3792.96,4068.42 U1.78@3792.45,4068.42 ; U1.86@3793.47,3911.06 3825.77,3911.06 3844.73,3930.02 ; U1.95@3793.48,3733.04 3851.57,3733.04 v1(3851.91,3733.39) ; 3861.92,4227.37 3879.92,4209.37 U1.74@3879.92,4174.52 ; 4056.87,4125.48 U1.65@4056.87,4174.69 ; U1.11@4057.84,3568.85 4057.84,3659.07 v1@4058.18,3659.41 ; v1(4165.41,4120.61) 4174.98,4130.18 U1.59@4174.98,4174.26 ; R1.1@4224.7,4279.69 4253.57,4279.69 4268.57,4294.69 ; U1.53@4291.89,4175.26 4291.89,4123.88 4276.21,4108.19 4277.85,4108.19 4305.92,4080.12 4305.92,4022.75 4326.27,4002.4 4326.27,3986.7 4340.26,3972.71 4340.26,3891.94 ; U1.33@4399.2,3772.91 4429.16,3772.91 4441.96,3785.71 4441.96,3819.44 U1.36@4429.13,3832.27 ; v1(4399.28,3606.94) U1.26@4399.28,3635.31 ; U1.43@4399.76,3969.32 4439.71,3969.32 v1(4442.15,3971.76) ; U1.38@4399.9,3869.47 4362.73,3869.47 4340.26,3891.94 ; U1.36@4401.66,3832.06 4400.72,3833 4360.51,3833 4340.26,3853.25 4340.26,3891.94 ; v1@4629.8,3482.89 U2.33@4629.8,3515.7 ; v1@4630.82,3483.92 v1(4633.21,3481.53) 4640.01,3474.73 4753.98,3474.73 v1(4757.64,3478.39) ; v1(4803.6,3726.98) 4912.68,3836.06 v1@4912.68,3883.51 ; U2.52@5004.16,3516.09 5004.16,3549.81 v1(5020.79,3566.44) ; 5064.27,3295.21 5065.05,3295.99 v1(5065.05,3318.74) ; U1.78@3792.45,4068.42 3829.35,4067.39 3844.73,4052.01 3844.73,3930.02
  Bottom Layer w10: v1(3602.01,3655.52) 3719.39,3655.52 v1(3719.9,3656.03) ; v1@3851.57,3732.36 3851.91,3732.7 v1(3851.91,3733.39) ; v1(4334.92,3981.48) 4344.64,3971.76 v1(4442.15,3971.76)
  other v1: 5105.38,3379.15 5141.77,3379.15 5178.16,3379.15 5178.16,3419.15 5178.16,3459.15 3094.66,3490.73 5178.16,3499.15 4472.55,3516.51 5178.16,3539.15 5077.13,3570.42 5178.16,3579.15 5050.47,3600.05 5178.16,3619.15 5077.13,3627.14 5050.47,3653.06 5178.16,3659.15 4060.23,3660.09 5077.13,3683.86 3358.33,3685.66 5178.16,3699.15 5050.47,3706.07 5178.16,3739.15 5077.13,3740.58 5178.16,3779.15 5178.16,3819.15 5178.16,3859.15 4914.22,3889.66 5178.16,3899.15 5178.16,3939.15 5178.16,3979.15 5178.16,4019.15 3309.09,4057.16 3359.88,4057.16 5178.16,4059.15 3404.47,4080.58 3449.62,4080.58 3335.43,4088.74 5178.16,4099.15 3727.01,4106.35 4064.1,4117.03 4430.56,4128.82 5178.16,4139.15 3814.71,4169.98 5178.16,4179.15 4292.72,4211.45 5178.16,4219.15 3159.99,4247.07 3199.99,4247.07 3239.99,4247.07 3279.99,4247.07 3319.99,4247.07 3359.99,4247.07 3399.99,4247.07 3439.99,4247.07 3479.99,4247.07 3519.99,4247.07 3559.99,4247.07 3599.99,4247.07 3639.99,4247.07 5178.16,4259.15 5178.16,4299.15 5178.16,4339.15 3098.8,4346.69 4933.85,4351.59 4973.85,4351.59 5013.85,4351.59 5053.85,4351.59 4423.44,4377.97 5178.16,4379.15 3098.76,4381.46 3138.76,4381.46 3178.76,4381.46 3218.76,4381.46 3258.76,4381.46 3298.76,4381.46 3338.76,4381.46 3378.76,4381.46 3418.76,4381.46 3458.76,4381.46 3498.76,4381.46 3538.76,4381.46 3578.76,4381.46 3618.76,4381.46 3658.76,4381.46 3698.76,4381.46
TCK: R1.2 U1.62 XP1.5 | length 227.7
  Top Layer w10: U1.62@4116.01,4174.44 4116.01,4227.54 4238.16,4349.69 XP1.5@4240,4349.69
TDI: R3.1 U1.4 U1.72 XP1.3 | length 841.8
  Top Layer w10: U1.4@3919.16,3569.69 U1.72@3919.16,4174.44 3920,4175.28 3920,4249.69 R3.1@3950,4279.69 4020,4349.69 XP1.3@4040,4349.69
TDO: R2.1 U1.73 XP1.2 | length 192
  Top Layer w10: R2.1@3899.4,4279.69 3940,4320.29 XP1.2@3940,4349.69 ; U1.73@3899.47,4174.44 R2.1@3899.47,4279.62
TMS: R4.1 U1.15 U1.63 XP1.4 | length 815.9
  Top Layer w10: U1.15@4135.69,3568.14 4135,3568.83 4135,4089.69 4096.32,4128.37 U1.63@4096.32,4174.44 4096.32,4256 4120,4279.69 4120,4329.69 XP1.4@4140,4349.69
VCC: C1.1 C2.2 C3.1 C4.1 C5.1 C6.1 C7.1 C8.1 CART1.1 R2.2 R3.2 R4.2 R5.2 U1.3 U1.18 U1.27 U1.34 U1.39 U1.51 U1.66 U1.82 U1.91 U2.29 U2.43 U3.7 U3.10 U3.16 U3.37 XP1.1 | length 9286.6
  Top Layer w10: C8.1@3103.06,4207.72 3306.09,4207.72 ; C8.1@3103.72,4207.4 3103.72,3528.09 C7.1@3186.65,3443.03 ; CART1.1@3213.47,3208.49 3213.47,3360.59 C1.1@3184.37,3389.69 3185,3390.32 C7.1@3185,3444.69 C7.1@3186.65,3443.03 ; U3.16@3327.92,4152.27 3327.92,4185.89 3306.09,4207.72 ; U3.37@3405.85,3584.14 3405.85,3551.34 v1(3426.81,3530.38) ; v1(3430.76,3434.84) 3427.49,3438.11 3191.57,3438.11 C7.1@3186.65,3443.03 ; U3.10@3445.81,4153.58 3445.81,4193.31 3431.4,4207.72 ; U3.7@3504.31,4151.84 3504.31,4185.46 3482.04,4207.72 ; 3701.71,4207.43 3701.42,4207.72 3482.04,4207.72 ; 3703.14,4207.39 C4.1@3743.44,4207.39 ; 3704.33,4205.96 3704.33,4145.05 ; 3704.33,4207.92 3704.33,4252.46 3731.84,4279.96 R2.2@3840,4279.96 ; C2.2@3717.12,3812.66 3704.33,3825.45 3704.33,4008.82 ; C2.2@3725.9,3812.66 3726.21,3812.35 U1.91@3792.09,3812.35 ; U1.82@3793.4,3989.83 3723.32,3989.83 3704.33,4008.82 ; U1.91@3794.55,3812.45 3843.05,3812.45 3899.02,3756.48 U1.3@3899.02,3568.48 ; R2.2@3840,4279.69 R2.2@3840,4279.96 ; XP1.1@3840,4349.69 R2.2@3840,4279.96 ; R2.2@3840.55,4279.96 R2.2@3840,4279.96 ; v1(3892.45,4126.27) 3889.14,4129.58 3719.79,4129.58 3704.33,4145.05 ; v1(3950.52,4126.71) 4019.18,4126.71 4036.18,4143.7 4036.86,4175.61 U1.66@4036.86,4174.78 ; R3.2@4009.53,4279.57 4009.53,4269.09 v1(4037.47,4241.15) ; U1.66@4036.86,4174.19 U1.66@4036.86,4174.78 ; R4.2@4060.18,4279.28 4060.18,4263.85 v1(4037.47,4241.15) ; v1(4191.2,3659.72) 4191.2,3615.03 v1(4191.97,3614.26) 4194.59,3611.64 U1.18@4194.59,3567.54 ; U1.51@4332.66,4184.13 U1.51@4334.7,4186.17 ; v1(4336.81,4187.53) 4341.71,4182.62 C3.1@4392.31,4182.62 ; 4392.97,4161.14 4324.95,4093.12 4324.95,4045.74 4356.97,4013.72 4356.97,3901.27 4366.86,3891.38 U1.39@4400.05,3891.38 ; U1.27@4396.98,3654.82 4356.81,3654.82 4340.26,3671.37 4340.26,3775.37 4357.24,3792.36 U1.34@4399.6,3792.36 ; U1.27@4399.96,3655.2 v1@4446.59,3655.2 ; v1(4430.67,4281.59) 4430.67,4282.24 4540.5,4392.08 4733.72,4392.08 4764.93,4360.88 R5.2@4764.93,4358.26 ; v1(4516.93,3547.51) 4547.07,3517.37 U2.29@4547.07,3512.19 ; v1(4551.15,3339.42) 4552.14,3340.41 v1(4843.02,3340.41) 4906.07,3340.41 v1(4908.63,3337.84) ; R5.2@4765.26,4360.53 4794.07,4389.35 5082.24,4389.35 5128.08,4343.5 5128.08,3503.21 C5.1@5003.97,3379.11 ; U2.43@4827.65,3516.73 4827.65,3467.53 4842,3453.17 v1(4842,3450.61) ; 3306.09,4207.72 3431.4,4207.72 ; 3431.4,4207.72 3482.04,4207.72 ; 3704.33,4008.82 3704.33,4145.05 ; U1.66@4036.86,4174.78 v1(4037.47,4241.15)
  Bottom Layer w10: v1(3430.76,3434.84) 3376.62,3488.98 3376.62,3530 3376.47,3530.14 3382.15,3535.82 3421.37,3535.82 v1(3426.81,3530.38) 3515.92,3619.5 3515.92,3785.78 3528.2,3798.06 3854.67,3798.06 v1(3856.28,3799.67) ; v1(3892.45,4126.27) 3892.89,4126.71 v1(3950.52,4126.71) ; v1(3894.85,3614.26) v1(4191.97,3614.26) ; v1(4037.47,4241.15) 4037.47,4242.1 4307.63,4242.1 ; v1(4191.2,3659.72) 4347.95,3659.72 v1(4352.31,3655.36) ; v1@4334.48,4183.16 4334.48,4215.25 4307.63,4242.1 ; v1(4430.67,4281.59) 4391.18,4242.1 4307.63,4242.1 ; v1@4446.07,3655.73 4446.07,3618.37 v1(4516.93,3547.51) ; v1@4550.64,3514.21 4551.15,3514.21 v1(4551.15,3339.42) ; v1(4843.02,3340.41) v1@4843.02,3447.53 ; v1@4908.12,3340.41 4962.57,3340.41 v1(5048.6,3426.43)
  other v1: 4547.05,3513.7 4444,3651.95
~CS2~: U3.44 | length 2973.5
  Top Layer w10: v1(3128.63,3813.71) 3137.99,3823.08 3461.33,3823.08 3544.17,3740.23 U3.44@3544.17,3586.05 ; 4933.44,3292.25 4934.91,3293.72 v1(4934.91,3318.74)
  Bottom Layer w10: v1(3128.63,3813.71) 3128.63,3477.63 3444.78,3161.48 4777.65,3161.48 v1(4934.91,3318.74)
~CS~: U1.9 U2.32 | length 1521.1
  Top Layer w10: 3459.06,3298.68 3630.41,3470.03 3952.06,3470.03 4016.72,3534.69 U1.9@4016.72,3568.2 ; v1(4017.07,3640.24) 4018.26,3639.05 4018.26,3569.93 U1.9@4017.07,3568.74 ; v1@4309.53,3477.07 4313.19,3473.41 4599.98,3473.41 4611.34,3484.76 U2.32@4611.34,3505.95 ; U1.9@4016.72,3568.2 U1.9@4017.07,3568.74 ; U1.9@4016.72,3568.2 4016.72,3568.39 U1.9@4017.07,3568.74
  Bottom Layer w10: v1(4017.07,3640.24) 4018.76,3638.55 4269.7,3638.55 4309.61,3598.63 v1(4309.61,3479.21)
~RD~: U1.8 U2.34 U3.48 | length 1886.4
  Top Layer w10: 3400.67,3298.06 3588.64,3486.03 3945.43,3486.03 3996.29,3536.89 3996.29,3567.61 U1.8@3998.39,3569.71 ; U3.48@3621.7,3585.47 3621.7,3547.99 v1(3625,3544.69) ; v1(3993.54,3727.81) 3996.07,3725.28 3996.07,3569.18 U1.8@3996.64,3568.61 ; v1(4560.39,3749.92) 4560.39,3665.02 v1@4560.53,3664.88 ; v1(4560.53,3586.29) 4560.78,3586.04 4602.39,3586.04 4648.94,3539.49 U2.34@4648.94,3506.72
  Bottom Layer w10: v1@3589.8,3484.6 3589.8,3509.95 3624.54,3544.69 v1(3625,3544.69) ; v1(3993.54,3727.81) 4010.53,3744.8 4559.1,3744.8 4560.36,3746.07 v1(4560.39,3749.92) ; v1(4560.53,3586.29) v1(4560.53,3662.92)
  other v1: 3589.6,3481.33
~WR~: U1.6 U2.13 U3.6 | length 2933.3
  Top Layer w10: 3338.51,3295.18 3545.66,3502.33 3922.36,3502.33 3957.98,3537.95 3957.98,3568.15 U1.6@3959.97,3570.15 ; v1(3518.39,4016.75) 3518.39,4105.16 3523.82,4110.59 U3.6@3523.82,4154.45 ; U1.6@3959.01,3569.93 v1(3958.99,4017.03) ; v1(4845.49,4020.54) 4845.49,4281.43 U2.13@4848.07,4284
  Bottom Layer w10: v1(3518.39,4016.75) 3518.67,4017.03 v1(3958.99,4017.03) 3960.32,4018.36 4290.3,4018.36 4292.39,4020.45 4845.4,4020.45 v1(4845.49,4020.54)
pads on no net: U1.1 U1.2 U1.5 U1.7 U1.22 U1.24 U1.31 U1.55 U1.64 U1.67 U1.68 U1.69 U1.70 U1.71 U1.75 U1.76 U1.77 U1.79 U1.80 U1.81 U1.83 U1.84 U1.85 U1.87 U1.88 U1.90 U1.92 U1.94 U1.96 U1.97 U1.98 U1.99 U1.100 U2.16 U2.17 U2.28 U2.30 U2.53 U2.55 U2.56 U3.3 U3.9 U3.11 U3.12 U3.14 U3.15 U3.17 U3.30 U3.31 U3.32 U3.36 U3.43 U3.47

## Polygon pours and split planes (outlines as drawn)
GND on Top Layer (solid, remove dead copper, pour order 0): 3042.3,3045.44 5239,3045.44 5239,4437.34 3042.3,4437.34
GND on Bottom Layer (solid, remove dead copper, pour order 4): 3025.7,3005.13 5260.2,3005.13 5260.2,4453.83 3025.7,4453.83

## Keep-outs
Top Layer:
  region: 3000,3000 5260.2,3000 5260.2,3314 3000,3314
Board Outline Layer:
  lines w10: 3069.13,3348.11 3069.13,4411.1 5210.87,4411.1 5210.87,3348.11 5108.5,3348.11 5108.5,3072.52 3171.5,3072.52 3171.5,3348.11 3069.13,3348.11